# EAGLE board SMD_Breakout_2 (EAGLE 7.2.0)
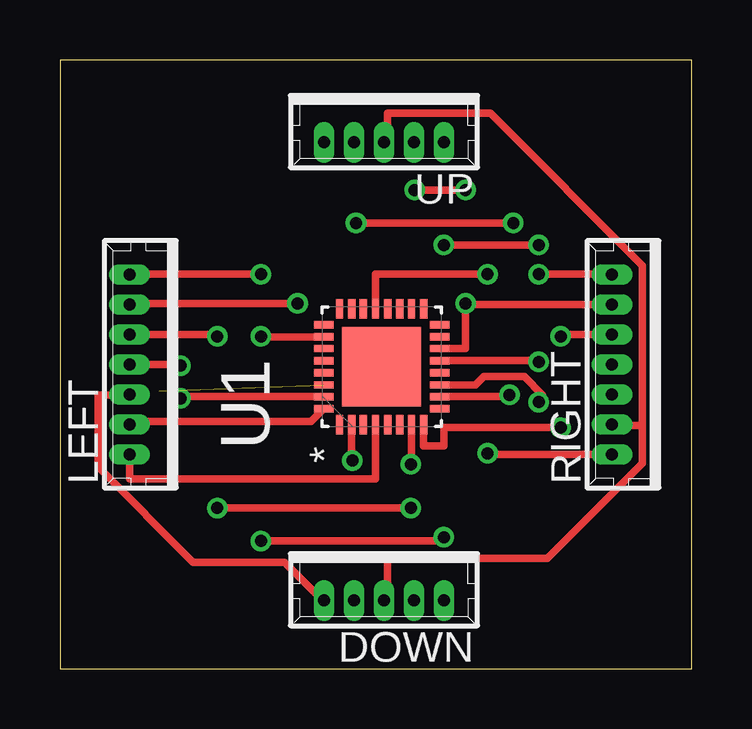
[diagram p0: board, top side]
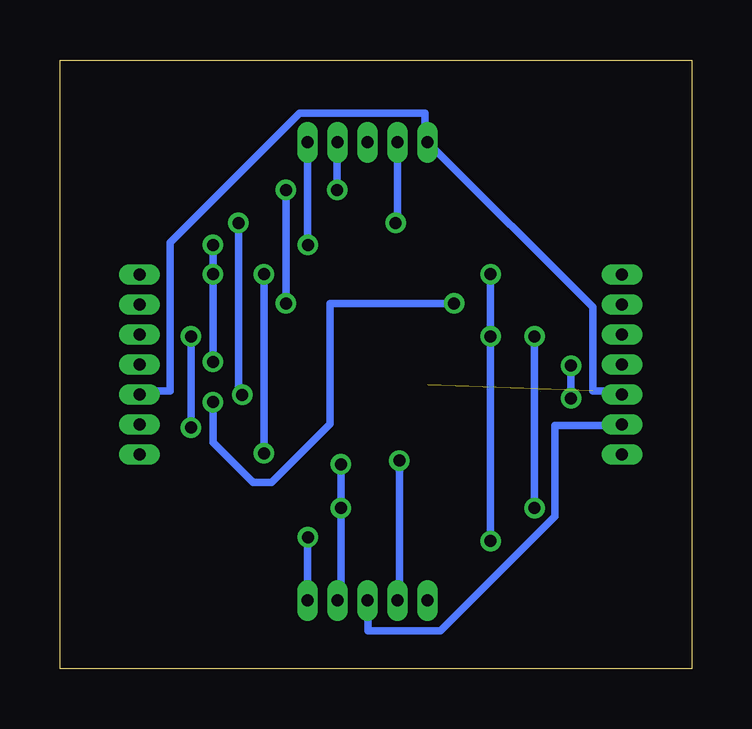
[diagram p1: board, bottom side, seen from below]

Size 26.34 x 25.39 mm. Coordinates in mm from the lower left corner, seen from the top.
Outline: 0,0 26.34,0 26.34,25.39 0,25.39 0,0
Copper layers (1*16): Top 0.0356mm / dielectric 1.5011mm / Bottom 0.0356mm
Design rules "LaenPCBOrder": minimum track width 6mil, minimum drill 13mil, track to track 6mil, track to pad 6mil, pad to pad 6mil, via to via 6mil, smd to smd 6mil, copper to edge 15mil, drill to drill 6mil, minimum pad ring 7mil, minimum via ring 7mil, stop-mask expansion 3mil, vias tented up to drill 0mil, thermal gap 10mil

## Footprints (pad centres in the part's own frame; a part is rotated, then mirrored left to right if it is on the bottom)
53047-05 = drill 0.5 pad 0.698 long: 1 2.5,0.45; 2 1.25,0.45; 3 0,0.45; 4 -1.25,0.45; 5 -2.5,0.45
53047-07 = drill 0.5 pad 0.698 long: 1 3.75,0.45; 2 2.5,0.45; 3 1.25,0.45; 4 0,0.45; 5 -1.25,0.45; 6 -2.5,0.45; 7 -3.75,0.45
QFN50P500X500X100-32N = smd 0.813 x 0.305: 1 -2.413,1.753; 2 -2.413,1.245; 3 -2.413,0.762; 4 -2.413,0.254; 5 -2.413,-0.254; 6 -2.413,-0.762; 7 -2.413,-1.245; 8 -2.413,-1.753; 17 2.413,-1.753; 18 2.413,-1.245; 19 2.413,-0.762; 20 2.413,-0.254; 21 2.413,0.254; 22 2.413,0.762; 23 2.413,1.245; 24 2.413,1.753 | smd 0.305 x 0.813: 9 -1.753,-2.413; 10 -1.245,-2.413; 11 -0.762,-2.413; 12 -0.254,-2.413; 13 0.254,-2.413; 14 0.762,-2.413; 15 1.245,-2.413; 16 1.753,-2.413; 25 1.753,2.413; 26 1.245,2.413; 27 0.762,2.413; 28 0.254,2.413; 29 -0.254,2.413; 30 -0.762,2.413; 31 -1.245,2.413; 32 -1.753,2.413 | smd 3.302 x 3.302: 33 0,0

## Placement (x,y rotation side)
DOWN  53047-05  [53047-05]  13.51,3.3 180 top
LEFT  53047-07  [53047-07]  3.35,12.7 90 top
RIGHT  53047-07  [53047-07]  23.47,12.7 90 top
U1  ATTINY461A-SUATTINY461A-QFN  [QFN50P500X500X100-32N]  13.41,12.6 90 top
UP  53047-05  [53047-05]  13.51,22.4 180 top

## Library data of the parts
DOWN UP = con-molex; MF: MOLEX; MPN: 53047-0510; OC_FARNELL: 9732861; OC_NEWARK: 38C9901
LEFT RIGHT = con-molex; MPN: 53047-0710-C; OC_FARNELL: 9732870; OC_NEWARK: 11M0149
U1 = Atmel_By_element14_Batch_1-00

## Nets
AVCC: U1.18
CLK_IN: DOWN.4 LEFT.3 U1.7
CLK_OUT: RIGHT.2 U1.14 UP.4
DOWN: DOWN.2 U1.2
GND: RIGHT.7 U1.21
LEFT: LEFT.4 U1.31
MDO: RIGHT.1 U1.13 UP.5
N$1: LEFT.2 U1.11
RIGHT: RIGHT.3 U1.8
SCL: DOWN.3 LEFT.6 RIGHT.6 U1.32 UP.3
SDA: DOWN.1 LEFT.5 RIGHT.5 U1.30 UP.1
SDI: DOWN.5 LEFT.1 U1.26
UP: U1.10 UP.2
VDD: LEFT.7 U1.4

## Tracks (layer width: path | path; a pad name or v marks a point on that pad's centre or on a via)
CLK_IN  (via drill 0.5)
  Top 0.305: U1.7 14.66,8.53 v14.63,8.53 | LEFT.3 6.55,13.95 v6.55,13.87 | v6.55,6.71 v14.63,6.71
  Bottom 0.305: v14.63,8.53 v14.63,6.71 14.63,2.85 DOWN.4 | v6.55,13.87 v6.55,6.71
CLK_OUT  (via drill 0.5)
  Top 0.305: U1.14 16.92,13.36 16.92,15.2 | 16.92,15.2 RIGHT.2 | 16.92,15.2 v16.92,15.24 | v16.92,19.96 v14.78,19.96
  Bottom 0.305: v16.92,15.24 v16.92,19.96 | v14.78,19.96 14.78,21.95 UP.4
DOWN  (via drill 0.5)
  Top 0.305: U1.2 12.17,8.69 v12.19,8.69
  Bottom 0.305: v12.19,8.69 12.19,2.85 DOWN.2
GND  (via drill 0.5)
  Top 0.305: U1.21 13.16,16.46 v17.83,16.46 | v17.83,8.99 17.83,8.95 RIGHT.7
  Bottom 0.305: v17.83,16.46 v17.83,8.99
LEFT  (via drill 0.5)
  Top 0.305: LEFT.4 5.03,12.7 v5.03,12.65 | U1.31 5.03,11.35 v5.03,11.28
  Bottom 0.305: v5.03,12.65 v5.03,11.28
MDO  (via drill 0.5)
  Top 0.305: U1.13 19.96,12.85 v19.96,12.8 | v19.96,16.46 RIGHT.1 | v16,17.68 v19.96,17.68
  Bottom 0.305: v19.96,12.8 v19.96,16.46 v19.96,17.68 | UP.5 16.01,17.68 v16,17.68
N$1  (via drill 0.5)
  Top 0.305: U1.11 17.32,11.84 17.68,12.19 19.36,12.19 20.12,11.43 19.96,11.28 v19.96,11.12 | v9.91,15.24 3.02,15.24 LEFT.2
  Bottom 0.305: v19.96,11.12 19.96,9.45 18.29,7.77 17.53,7.77 15.09,10.21 15.09,15.24 v9.91,15.24
RIGHT  (via drill 0.5)
  Top 0.305: U1.8 15.16,9.3 16,9.3 16,10.06 v20.88,10.06 | v20.88,13.87 20.88,13.95 RIGHT.3
  Bottom 0.305: v20.88,10.06 v20.88,13.87
SCL
  Top 0.305: U1.32 10.95,10.79 10.48,10.32 3.02,10.32 LEFT.6 | 24.29,10.16 24.29,8.57 20.32,4.6 13.65,4.6 13.65,2.86 DOWN.3 | 24.29,10.16 23.18,10.16 RIGHT.6 | 24.29,10.16 24.29,16.83 17.94,23.18 13.65,23.18 13.65,22.07 UP.3
  Bottom 0.305: LEFT.6 3.02,10.16 5.71,10.16 5.71,6.35 10.48,1.59 13.49,1.59 13.49,2.7 DOWN.3
SDA  (1 unrouted)
  Top 0.305: DOWN.1 10.95,2.86 9.37,4.45 5.56,4.45 1.59,8.41 1.59,11.43 2.86,11.43 LEFT.5
  Bottom 0.305: LEFT.5 3.02,11.59 4.13,11.59 4.13,15.08 10.95,21.91 UP.1 11.11,22.07 11.11,23.18 16.35,23.18 21.75,17.78 21.75,11.59 23.02,11.59 RIGHT.5
SDI  (via drill 0.5)
  Top 0.305: U1.26 8.38,13.84 v8.38,13.87 | v8.38,16.46 LEFT.1 | v16,5.49 16,5.33 v8.38,5.33
  Bottom 0.305: v8.38,16.46 v8.38,13.87 v8.38,5.33 | DOWN.5 16.01,5.49 v16,5.49
UP  (via drill 0.5)
  Top 0.305: U1.10 18.75,11.35 v18.75,11.43 | v18.9,18.59 v12.34,18.59
  Bottom 0.305: v18.75,11.43 18.9,11.43 v18.9,18.59 | v12.34,18.59 12.26,18.59 UP.2
VDD
  Top 0.305: U1.4 13.16,7.92 2.9,7.92 LEFT.7